# Altium PCB Four_Axis_Remoter_V1.0.0.PcbDoc (part 2 of 2)
Units mil, origin at the board's own origin, x right, y up, seen from the top; angles counter-clockwise.
Board outline 7165.07 x 4173.11 mil, 2 copper layers (Top Layer, Bottom Layer); 91 components, 71 nets, 332 pads, 134 vias.
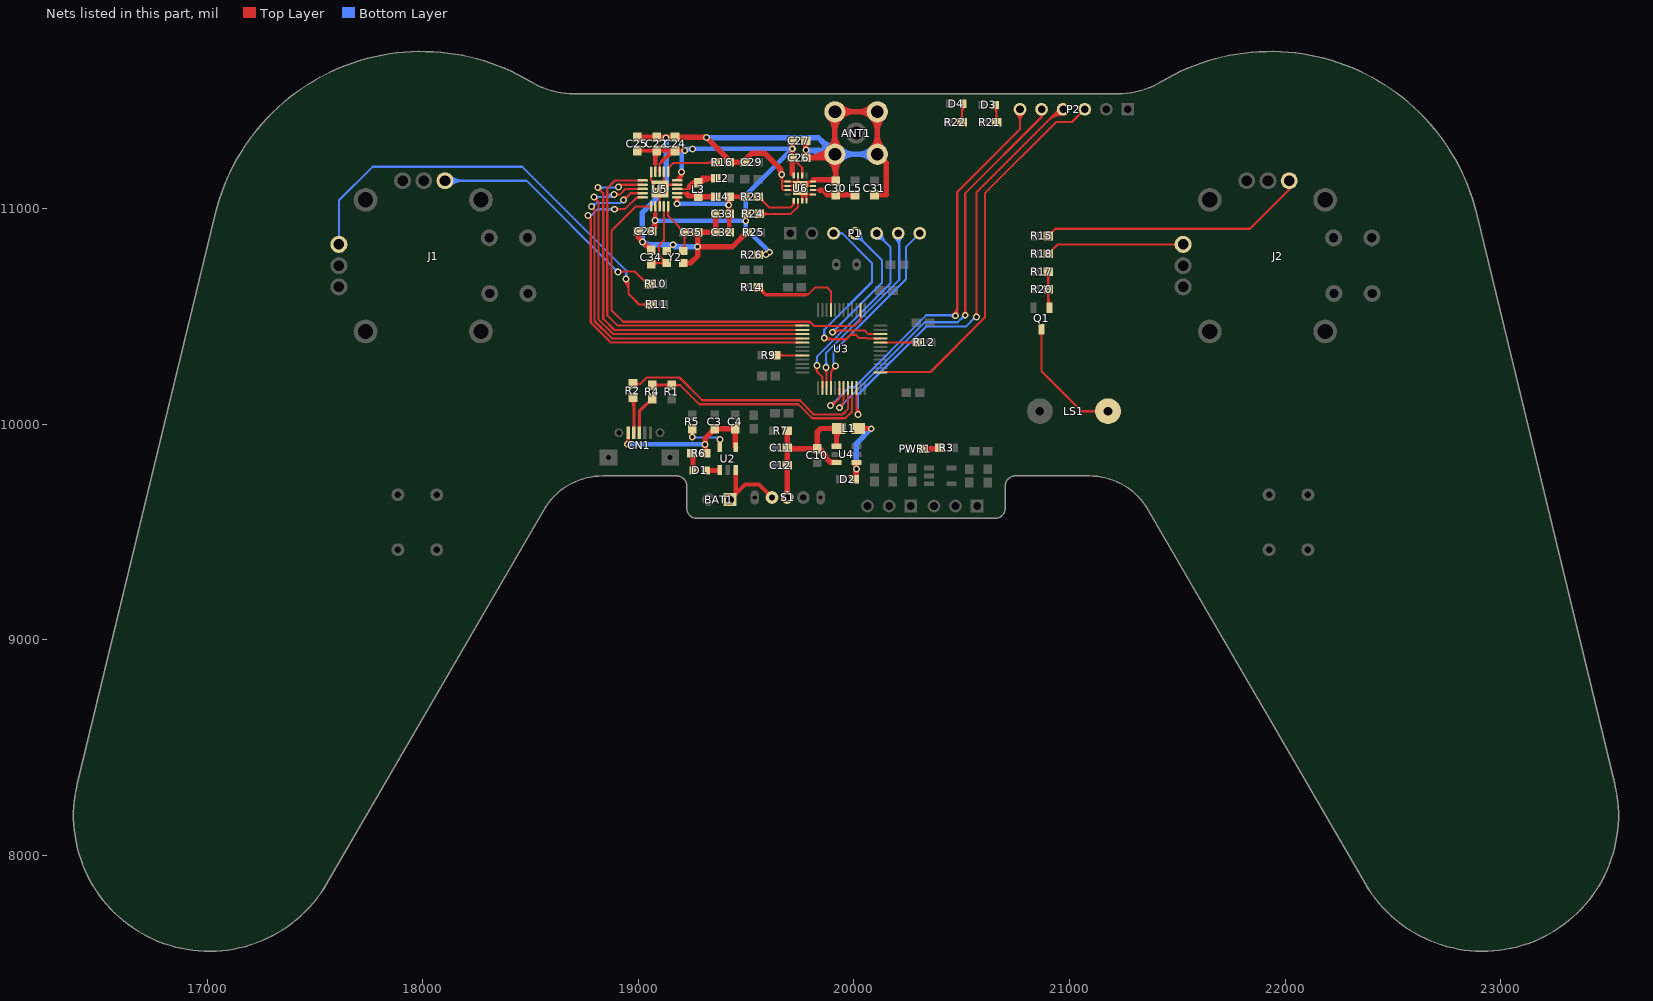
[diagram p2: the nets of this part, all layers, seen from the top]

## Via types
v1: diameter 32, hole 18, Top Layer to Bottom Layer, tented both sides, 88 vias
v2: diameter 100, hole 50, Top Layer to Bottom Layer, tented both sides, 46 vias

## Nets (pads, with @x,y where several pads share a name; then routed paths per layer and width w, separated by ;. In a path a pad name is that pad's centre, name@x,y a point inside that pad or via, vN(x,y) a via of type N, cw(c..) or ccw(c..) an arc to the next point about the centre after c; other vN are vias at no path point) (continued)
NetC30_1: C30.1 L5.1 U6.10 | length 204.7
  Top Layer w10: U6.10@19809.06,11085.16 19843,11085.16
  Top Layer w25: 19843,11085.16 19855.2,11085.16 19876.36,11064 C30.1@19915,11064 L5.1@20005,11064
NetC32_1: C32.1 C33.1 L4.2 R23.1 U5.11 | length 808.9
  Top Layer w20: v1@19174.76,11026.34 ccw(c19159.69,11041.41) 19181,11041.41 ; v1@19181,11021.88 U5.11@19181,11046.53 ; C32.1@19413.93,10897.07 ccw(c19396.86,10914.14) 19421,10914.14 ccw(c19445.14,10914.14) C32.1@19428.07,10897.07 ; C33.1@19413.93,10967.93 cw(c19396.86,10950.86) 19421,10950.86 cw(c19445.14,10950.86) C33.1@19428.07,10967.93 ; C33.1@19413.93,10982.07 ccw(c19396.86,10999.14) 19421,10999.14 ccw(c19445.14,10999.14) C33.1@19428.07,10982.07 ; L4.2@19413.93,11047.93 cw(c19396.86,11030.86) 19421,11030.86 cw(c19445.14,11030.86) L4.2@19428.07,11047.93 ; v1@19414.76,11012.75 cw(c19399.69,10997.68) 19421,10997.68 ; v1@19414.76,11021.23 ccw(c19399.69,11036.3) L4.2@19421,11036.3 ; C32.1@19421,10890 C33.1@19421,10975 19421,11014.09 L4.2@19421,11055 R23.1@19494,11055 ; L4.2@19430.57,11047.93 cw(c19447.64,11030.86) 19447.64,11055 cw(c19447.64,11079.14) L4.2@19430.57,11062.07 ; R23.1@19484.43,11047.93 ccw(c19467.36,11030.86) 19467.36,11055 ccw(c19467.36,11079.14) R23.1@19484.43,11062.07
  Bottom Layer w20: v1(19179,11022.1) 19412.99,11022.1 19419,11016.09 v1(19419,11016.99) ; 19392.18,11022.1 cw(c19392.18,10990.16) v1@19414.76,11012.75
NetC34_2: C34.2 U5.9 Y2.1 | length 512.7
  Top Layer w10: C34.2@19060,10744 19063.24,10747.24 19131.32,10747.24 19096,10782.57 19096,10829.76 19118.43,10852.18 U5.9@19118.43,11010 ; C34.2@19070.61,10735.89 cw(c19098.01,10708.49) 19098.01,10747.24 ; C34.2@19070.61,10757.11 ccw(c19094.42,10780.92) 19094.42,10747.24 ; 19106.42,10772.15 cw(c19081.51,10747.24) Y2.1@19116.73,10747.24 ; 19110.94,10767.63 ccw(c19129.45,10786.14) Y2.1@19129.45,10759.96 ; Y2.1@19120.46,10738.25 ccw(c19098.75,10716.54) 19098.75,10747.24 ccw(c19098.75,10777.94) Y2.1@19120.46,10756.24
NetC35_2: C35.2 U5.10 Y2.3 | length 403.2
  Top Layer w10: U5.10@19138.11,11010 19138.11,10965.89 C35.2@19214,10890 19214,10808.76 Y2.3@19207.99,10802.76 ; 19184.13,10919.87 cw(c19154.25,10890) C35.2@19196.5,10890 ; 19190.16,10913.84 ccw(c19211.5,10935.18) C35.2@19211.5,10905 ; Y2.3@19201.56,10811.75 ccw(c19171.52,10841.78) 19214,10841.78 ; C35.2@19203.39,10879.39 cw(c19177.79,10853.79) 19214,10853.79 cw(c19250.21,10853.79) C35.2@19224.61,10879.39 ; 19214,10825.13 ccw(c19232.93,10825.13) Y2.3@19219.54,10811.75
NetCN1_2: CN1.2 R2.1 | length 213.2
  Top Layer w15: R2.1@18966.16,10112.66 cw(c18934.18,10080.68) 18979.41,10080.68 ; R2.1@18975,10124 18979.41,10119.59 CN1.2@18979.41,9960 ; R2.1@18979.41,10101.97 cw(c18994.53,10101.97) R2.1@18983.84,10112.66
NetCN1_3: CN1.3 R4.1 | length 183.9
  Top Layer w15: CN1.3@19005,9960 19005,10059 R4.1@19065,10119
NetD1_1: D1.1 R6.1 | length 95.1
  Top Layer w25: R6.1@19246.2,9859.7 cw(c19228.56,9842.06) 19253.5,9842.06 ; D1.1@19253.5,9785 R6.1@19253.5,9860.5
NetD1_2: D1.2 U2.1 | length 59
  Top Layer w25: D1.2@19316.5,9785 U2.1@19375.5,9785
NetD2_1: D2.1 L1.1 U4.1 | length 441.9
  Top Layer w25: D2.1@19998.2,9750.3 ccw(c19966.66,9781.84) v1@20011.26,9781.84 ; D2.1@20001,9745 20011.26,9755.26 v1(20011.26,9791.75) U4.1@20011.26,9822.6 ; L1.1@20020,9980 20079.74,9980 v1@20080,9979.74 ; L1.1@20035.16,9970.74 cw(c20057.51,9948.4) 20057.51,9980 cw(c20057.51,10011.6) L1.1@20035.16,9989.26
  Bottom Layer w25: v1(20011.26,9791.75) 20011.26,9909.81 v1(20080,9978.55)
NetD3_1: D3.1 R21.1 | length 171.2
  Top Layer w10: D3.1@20648.9,11468.46 cw(c20619.68,11439.24) 20661,11439.24 ; R21.1@20650.39,11410.61 ccw(c20624.79,11436.21) 20661,11436.21 ccw(c20697.21,11436.21) R21.1@20671.61,11410.61 ; D3.1@20656.5,11480 20661,11475.5 R21.1@20661,11400
NetD4_1: D4.1 R22.1 | length 195.4
  Top Layer w10: R22.1@20490.39,11410.61 ccw(c20464.79,11436.21) 20501,11436.21 ccw(c20537.21,11436.21) R22.1@20511.61,11410.61 ; R22.1@20501,11400 20501,11479.5 D4.1@20506.5,11485 ; 20501,11441.85 cw(c20545.71,11441.85) D4.1@20514.1,11473.46 ; D4.1@20501,11465.99 cw(c20521.57,11465.99) D4.1@20507.03,11480.53
NetJ1_3: J1.3 R11.2 | length 2217.6
  Top Layer w10: v1@18935.22,10664.5 cw(c18888.08,10617.36) 18954.75,10617.36 ; v1@18942.29,10671.58 cw(c18912.22,10641.51) 18954.75,10641.51 ; v1(18943,10672.28) 18954.75,10660.53 18954.75,10603.41 19003.16,10555 R11.2@19054,10555 ; R11.2@19040.89,10544.39 ccw(c19015.29,10518.79) 19015.29,10555 ccw(c19015.29,10591.21) R11.2@19040.89,10565.61
  Bottom Layer w10: J1.3@17611.3,10833.43 17611.3,11037.02 17767.89,11193.61 18462.09,11193.61 18944,10711.69 v1@18944,10672.28 ; v1@18935.22,10680.06 ccw(c18914.03,10701.25) 18944,10701.25 ; 18944,10696.43 ccw(c18967.14,10696.43) v1@18950.78,10680.06
NetJ1_6: J1.6 R10.1 | length 1508.7
  Top Layer w10: v1@18908,10707.44 18984.56,10707.44 19042,10650 R10.1@19049,10650 ; v1@18912.78,10698.29 cw(c18934.86,10676.21) 18934.86,10707.44 ; v1@18912.78,10713.85 ccw(c18928.25,10729.33) 18928.25,10707.44 ; 19013.21,10678.79 ccw(c19046.5,10712.08) R10.1@19046.5,10665 ; 19024.08,10667.92 cw(c19006.15,10650) R10.1@19031.5,10650
  Bottom Layer w10: J1.6@18103.43,11128.7 18481.74,11128.7 18899.99,10710.45 v1@18911,10710.45 ; J1.6@18120.66,11111.47 cw(c18162.26,11069.87) 18162.26,11128.7 cw(c18162.26,11187.54) J1.6@18120.66,11145.93 ; J1.6@18127.73,11104.4 cw(c18186.4,11045.72) 18186.4,11128.7 cw(c18186.4,11211.68) J1.6@18127.73,11153 ; 18885.14,10725.3 ccw(c18905,10745.15) v1@18905,10717.07 ; 18886.67,10723.77 cw(c18868.97,10706.07) v1@18894,10706.07
  other v1: 18905,10706.07
NetJ2_3: J2.3 R18.2 | length 643.3
  Top Layer w10: R18.2@20901,10790 20944.43,10833.43 J2.3@21526.3,10833.43
NetJ2_6: J2.6 R15.1 | length 1247.2
  Top Layer w10: R15.1@20901,10872.5 20934.63,10906.13 21836.29,10906.13 22018.43,11088.26 J2.6@22018.43,11128.7
NetL2_1: L2.1 L3.2 U5.13 | length 296.6
  Top Layer w10: U5.13@19180,11090.63 19235.34,11090.63 19240.74,11096.03 ; L3.2@19264.71,11120 L3.2@19278,11120
  Top Layer w25: 19236,11100.77 19255.23,11120 L3.2@19264.71,11120 ; 19243.85,11108.62 cw(c19262.42,11090.05) L3.2@19274.54,11113.35 ; L3.2@19278,11120 19298,11140 L2.1@19359,11140 ; L3.2@19283.3,11117.2 cw(c19338.36,11062.14) L2.1@19338.36,11140
NetL3_1: L3.1 L4.1 U5.12 | length 187.5
  Top Layer w10: U5.12@19180,11070.94 19226,11070.94 ; L4.1@19356,11058 L4.1@19359,11055
  Top Layer w25: 19226,11065.26 19233.26,11058 L3.1@19278,11058 19281,11055 L4.1@19359,11055
NetLS1_2: LS1.2 Q1.3 | length 613.8
  Top Layer w10: Q1.3@20863.79,10423.75 cw(c20848.8,10408.76) 20870,10408.76 cw(c20891.2,10408.76) Q1.3@20876.21,10423.75 ; Q1.3@20870,10440.79 20870,10244.77 21054.77,10060 LS1.2@21178,10060
NetPWR1_1: PWR1.1 R3.1 | length 105.1
  Top Layer w25: PWR1.1@20316.5,9885 R3.1@20394,9885 ; 20366.32,9885 ccw(c20366.32,9920.18) R3.1@20391.2,9895.3
NetQ1_1: Q1.1 R17.2 R20.1 | length 390.3
  Top Layer w10: R20.1@20890.39,10614.39 cw(c20864.79,10588.79) 20901,10588.79 cw(c20937.21,10588.79) R20.1@20911.61,10614.39 ; R20.1@20890.39,10635.61 ccw(c20864.79,10661.21) 20901,10661.21 ccw(c20937.21,10661.21) R20.1@20911.61,10635.61 ; R17.2@20890.39,10696.89 cw(c20864.79,10671.29) 20901,10671.29 cw(c20937.21,10671.29) R17.2@20911.61,10696.89 ; Q1.1@20901,10562.55 ccw(c20919.91,10562.55) Q1.1@20906.54,10549.18 ; 20901,10586.69 ccw(c20944.05,10586.69) Q1.1@20913.61,10556.25 ; R17.2@20901,10707.5 R20.1@20901,10625 20901,10545.61 Q1.1@20907.4,10539.21
NetR5_2: R5.2 U2.5 | length 377.9
  Top Layer w10: R5.2@19239.39,9965.89 cw(c19213.79,9940.29) 19250,9940.29 cw(c19286.21,9940.29) R5.2@19260.61,9965.89 ; v1@19242.22,9948.46 ccw(c19223.44,9967.23) 19250,9967.23 ccw(c19276.56,9967.23) v1@19257.78,9948.46 ; v1@19250,9934.76 19250,9938.77 R5.2@19250,9979 ; v1@19371.22,9921.52 cw(c19357.27,9907.57) U2.5@19377,9907.57 ; U2.5@19373.76,9908.24 ccw(c19365.93,9916.07) v1@19377,9916.07 ; U2.5@19377,9897.92 cw(c19410.38,9897.92) v1@19386.78,9921.52 ; v1@19377,9920.9 ccw(c19394.9,9920.9) U2.5@19382.24,9908.24 ; v1@19377,9929.75 19377,9893.5 U2.5@19378,9892.5
  Bottom Layer w10: v1@19250,9938.77 19369.53,9938.77 v1(19379,9929.3)
  other v1: 19250,9940.68
NetR9_2: R9.2 U3.20 | length 180.8
  Top Layer w10: R9.2@19637.05,10318.95 U3.20@19760.92,10318.95 ; R9.2@19649.11,10309.39 cw(c19672.17,10286.33) 19672.17,10318.95 ; R9.2@19649.11,10330.61 ccw(c19677.26,10358.76) 19677.26,10318.95
NetR12_1: R12.1 U3.44 | length 228.6
  Top Layer w10: U3.44@20123.13,10378 20292,10378 R12.1@20294,10380 ; 20250.46,10378 ccw(c20250.46,10421.04) R12.1@20280.89,10390.61 ; 20260.11,10378 cw(c20260.11,10348.61) R12.1@20280.89,10369.39
NetR14_2: R14.2 U3.9 | length 506.5
  Top Layer w10: 19778,10602.13 19788,10602.13 19820.05,10634.17 19875,10634.17 19892.81,10616.36 U3.9@19892.81,10529.58
  Top Layer w15: R14.2@19556,10635.35 19591.72,10599.63 19778,10599.63 ; R14.2@19558.5,10622.85 cw(c19558.5,10598.71) R14.2@19575.57,10615.78 ; R14.2@19571,10635.35 ccw(c19607.21,10635.35) 19581.61,10609.74
NetR16_2: R16.2 U5.16 | length 326.9
  Top Layer w10: U5.16@19138.11,11170 19138.11,11187.87 19161.31,11211.07 19355.06,11211.07 R16.2@19359,11215 ; 19310.79,11211.07 ccw(c19310.79,11260.71) R16.2@19345.89,11225.61 ; 19329.79,11211.07 cw(c19329.79,11188.29) R16.2@19345.89,11204.39 ; 19334.93,11211.07 ccw(c19334.93,11236.57) R16.2@19352.96,11218.54
NetR23_2: R23.2 U6.5 | length 283.4
  Top Layer w10: R23.2@19556,11055 19566.13,11044.87 19606.59,11004.41 19707.06,11004.41 19720.47,11017.82 U6.5@19720.47,11035.94 ; R23.2@19558.5,11040 cw(c19558.5,11009.82) 19579.84,11031.16 ; R23.2@19573.5,11055 ccw(c19615.75,11055) 19585.87,11025.13 ; 19714.05,11011.4 ccw(c19698.37,11027.09) U6.5@19720.55,11027.09
NetR24_2: R24.2 U6.6 | length 277.4
  Top Layer w10: R24.2@19561,10975 19706.72,10975 19740.16,11008.44 U6.6@19740.16,11035.94 ; R24.2@19574.11,10964.39 cw(c19599.71,10938.79) 19599.71,10975 cw(c19599.71,11011.21) R24.2@19574.11,10985.61
NRF_CE: U3.13 U5.1 | length 1692.9
  Top Layer w10: U5.1@19020,11130 18891.74,11130 18856,11094.26 18856,10505.15 18904.41,10456.74 U3.13@19760.92,10456.74
NRF_CS: U3.14 U5.2 | length 1845.3
  Top Layer w10: v1@18812,11085.77 cw(c18812,11061.83) 18828.92,11078.76 ; v1(18812,11096.77) v1@18817,11091.77 ; v1@18817,11090.68 18837,11070.68 18837,10489.08 18887.21,10438.87 18889.02,10437.06 U3.14@19760.92,10437.06 ; v1@18823,11096.77 ccw(c18852.18,11096.77) 18831.55,11076.14 ; v1@18913.35,11110.32 U5.2@19020,11110.32
  Bottom Layer w10: v1(18812,11096.77) v1@18904.81,11096.77 ; v1@18819.78,11088.99 cw(c18838.56,11070.21) 18838.56,11096.77 cw(c18838.56,11123.32) v1@18819.78,11104.55
  other v1: 18908,11099.96
NRF_IRQ: U3.2 U5.6 | length 1842.5
  Top Layer w10: U5.6@19059.37,11010 18989.05,11010 18875,10895.95 18875,10529.35 18929.74,10474.61 19795.82,10474.61 19806.3,10464.14 19806.3,10463.95 19814.37,10455.88 20004.01,10455.88 20030.61,10482.48 U3.2@20030.61,10529.58
NRF_MISO: U3.17 U5.5 | length 1911
  Top Layer w10: 18779.13,10955.05 18779.13,10471.12 18865,10385.24 18872.25,10378 U3.17@19760.92,10378 ; v1@18887,10998.1 18938.87,10998.1 18992.03,11051.26 U5.5@19020,11051.26 ; v1@18896.78,10988.83 cw(c18919.16,10966.45) 18919.16,10998.1 ; v1@18896.78,11004.39 ccw(c18911.95,11019.56) 18911.95,10998.1 ; 18983.93,11043.16 cw(c19001.3,11025.79) U5.5@19001.3,11050.35 ; 18987.39,11046.62 cw(c18997.54,11036.48) U5.5@19001.08,11050.38
  Bottom Layer w10: v1(18767,10967.33) 18780.89,10967.33 18810.17,10996.61 v1(18889,10996.61) ; v1@18881.22,10988.83 ccw(c18862.44,10970.05) 18862.44,10996.61 ccw(c18862.44,11023.17) v1@18881.22,11004.39
NRF_MOSI: U3.16 U5.4 | length 1896.2
  Top Layer w10: v1@18777,11011.82 18797,10991.82 18797,10478.53 18877.84,10397.69 U3.16@19760.92,10397.69 ; v1@18782.42,10998.28 cw(c18783.1,10980.37) 18795.77,10993.05 cw(c18804.98,11002.26) v1@18792.52,11006.06 ; v1@18930,11047.45 18941.46,11047.45 18964.95,11070.94 U5.4@19020,11070.94 ; v1@18931,11051.27 ccw(c18931,11085.75) 18955.38,11061.37 ; v1@18942,11040.27 cw(c18960.64,11040.27) 18947.46,11053.45
  Bottom Layer w10: v1(18782,11009.28) 18790.86,11009.28 18807.84,11026.25 ; v1@18784.73,11019.93 ccw(c18790.74,11043.35) 18807.84,11026.25 ; v1(18931,11040.27) 18916.98,11026.25 18807.84,11026.25
NRF_SCK: U3.15 U5.3@19020,11090.63 | length 1998.8
  Top Layer w10: v1@18794,11042.25 cw(c18794,11018.31) 18810.93,11035.23 ; v1@18794.13,11052.04 18816,11030.16 18816,10484.8 18879.81,10420.99 18883.43,10417.37 U3.15@19760.92,10417.37 ; v1@18805,11053.25 ccw(c18834.17,11053.25) 18813.54,11032.62 ; v1(18887,11064.48) 18913.73,11064.48 18939.88,11090.63 U5.3@19020,11090.63 ; v1@18894.78,11056.7 cw(c18913.56,11037.92) 18913.56,11064.48 cw(c18913.56,11091.04) v1@18894.78,11072.26
  Bottom Layer w10: v1(18794,11053.25) 18875.77,11053.25 v1(18887,11064.48) ; v1@18801.78,11045.47 cw(c18820.56,11026.69) 18820.56,11053.25 cw(c18820.56,11079.8) v1@18801.78,11061.03 ; 18833.33,11053.25 ccw(c18833.33,11118.15) v1@18879.22,11072.26 ; 18857.47,11053.25 ccw(c18857.47,11094.01) v1@18886.29,11065.19
OLED_CS: P1.7 U3.28 | length 917.5
  Top Layer w10: U3.28@19892.81,10167.37 19892.81,10243.09 v1@19916,10266.28 ; 19895.21,10245.49 ccw(c19875.85,10264.86) v1@19903.07,10267.87 ; 19903.41,10253.7 cw(c19914,10243.11) v1@19914,10258.08
  Bottom Layer w10: v1@19905.13,10277.95 19905.13,10335.96 20242,10672.84 20242,10822 P1.7@20305,10885
  other v1: 19914,10269.08
OLED_DC: P1.6 U3.27 | length 1078.5
  Top Layer w10: v1@19863.22,10255.54 cw(c19839.31,10231.63) 19873.13,10231.63 ; U3.27@19873.13,10167.37 19873.13,10258.79 v1@19877,10262.67 ; 19873.13,10241.9 cw(c19892.42,10241.9) v1@19878.78,10255.54
  Bottom Layer w10: v1@19863.22,10271.1 ccw(c19844.44,10289.88) 19871,10289.88 ccw(c19897.56,10289.88) v1@19878.78,10271.1 ; v1(19871,10263.32) 19871,10330.66 20210,10669.66 20210,10880 P1.6@20205,10885 ; P1.6@20187.66,10867.66 cw(c20133.71,10813.71) 20210,10813.71 ; P1.6@20194.73,10874.73 cw(c20157.86,10837.86) 20210,10837.86 cw(c20252.14,10837.86) P1.6@20222.34,10867.66
OLED_DI: P1.4 U3.46 | length 1093
  Top Layer w10: v1@19899,10425.03 v1(19900.23,10426.26) 19908.7,10434.73 19934,10434.73 ; v1@19901.1,10425.76 cw(c19916.66,10416.76) 19916.66,10434.73 ; v1@19909.75,10420.75 cw(c19934,10406.72) 19934,10434.73 ; 19920,10434.73 19934,10434.73 ; U3.46@20123.13,10417.37 20065.87,10417.37 20048.5,10434.73 19934,10434.73
  Bottom Layer w10: v1(19900.23,10426.26) 20130,10656.03 20130,10760 P1.4@20005,10885 ; v1@19900.23,10437.26 ccw(c19900.23,10463.82) 19919.01,10445.04 ccw(c19937.79,10426.26) v1@19911.23,10426.26 ; P1.4@20005,10860.47 cw(c20005,10801.26) 20046.87,10843.13 cw(c20088.74,10885) P1.4@20029.53,10885 ; P1.4@20005,10870.47 cw(c20005,10835.4) 20029.8,10860.2 cw(c20054.6,10885) P1.4@20019.53,10885
OLED_DO: P1.3 U3.45 | length 1068.1
  Top Layer w10: v1@19868,10393.68 19962.84,10393.68 19984.04,10414.88 20007.96,10414.88 20024.08,10398.76 20059.2,10398.76 20060.27,10397.69 U3.45@20123.13,10397.69 ; v1@19869.78,10406.68 ccw(c19901.17,10438.07) 19901.17,10393.68
  Bottom Layer w10: v1@19854.22,10406.68 ccw(c19835.44,10425.46) 19862,10425.46 ccw(c19888.56,10425.46) v1@19869.78,10406.68 ; v1(19862,10398.9) 19862,10437.59 20083.92,10659.5 20083.92,10746.12 19945.04,10885 ; P1.3@19905,10885 19945.04,10885 ; P1.3@19926.85,10873.86 cw(c19945.03,10864.59) 19945.03,10885 ; P1.3@19926.85,10896.14 ccw(c19945.03,10905.41) 19945.03,10885
OLED_RES: P1.5 U3.26 | length 1127.5
  Top Layer w10: v1@19820.22,10263.37 cw(c19801.44,10244.59) 19828,10244.59 cw(c19854.56,10244.59) v1@19835.78,10263.37 ; v1(19828,10271.15) 19828,10244.44 19853.44,10219 U3.26@19853.44,10167.37
  Bottom Layer w10: v1@19820.22,10278.93 ccw(c19801.44,10297.71) 19828,10297.71 ccw(c19854.56,10297.71) v1@19835.78,10278.93 ; v1(19828,10271.15) 19828,10312.94 20169,10653.94 20169,10821 P1.5@20105,10885 ; P1.5@20105,10860.47 cw(c20105,10801.26) 20146.87,10843.13 cw(c20188.74,10885) P1.5@20129.53,10885 ; P1.5@20105,10870.47 cw(c20105,10835.4) 20129.8,10860.2 cw(c20154.6,10885) P1.5@20119.53,10885
RF_3V3: C22.1 C23.1 C24.1 C25.1 C26.2 C27.2 R24.1 R26.1 U5.7 U5.15 U5.18 U5.19 U6.14 U6.16 | length 3260.9
  Top Layer w10: 19079.06,10973.2 U5.7@19079.06,11010 ; U5.19@19079.06,11170 19079.06,11208.94 ; U5.18@19098.74,11170 19098.74,11207.21 19109.38,11217.86 ; 19714,11160.53 U6.16@19720.47,11154.06 ; C26.2@19714,11234.68 19759.84,11188.84 U6.14@19759.84,11154.06 ; C26.2@19716.5,11220 cw(c19716.5,11190.59) 19737.3,11211.38 ; C26.2@19731.5,11235 ccw(c19774.51,11235) 19744.1,11204.59
  Top Layer w20: C25.1@18995,11269 C22.1@19085,11269 ; C25.1@19002.07,11261.93 cw(c19019.14,11244.86) 19019.14,11269 cw(c19019.14,11293.14) C25.1@19002.07,11276.07 ; C23.1@19057.43,10902.07 ccw(c19005.22,10954.28) v1@19079.06,10954.28 ; C23.1@19062,10895 19079.06,10912.06 19079.06,10973.2 ; v1@19073.76,10940.31 cw(c19060.97,10927.52) 19079.06,10927.52 ; v1@19073.76,10948.79 ccw(c19060.97,10961.58) 19079.06,10961.58 ; C22.1@19077.93,11261.93 ccw(c19060.86,11244.86) 19060.86,11269 ccw(c19060.86,11293.14) C22.1@19077.93,11276.07 ; 19079.06,11208.94 19079.06,11263.06 C22.1@19085,11269 ; 19079.06,11228.01 cw(c19123.49,11228.01) C22.1@19092.07,11259.43 ; C22.1@19092.07,11261.93 cw(c19109.14,11244.86) 19109.14,11269 cw(c19109.14,11293.14) C22.1@19092.07,11276.07 ; 19109.38,11217.86 C24.1@19160.53,11269 ; 19132.49,11240.96 cw(c19170,11203.45) C24.1@19170,11256.5 ; C24.1@19162.93,11261.93 ccw(c19145.86,11244.86) 19145.86,11269 ccw(c19145.86,11293.14) C24.1@19162.93,11276.07 ; C24.1@19177.07,11261.93 cw(c19194.14,11244.86) 19194.14,11269 cw(c19194.14,11293.14) C24.1@19177.07,11276.07 ; U5.15@19185.22,11135.22 19199,11149 v1@19199,11168.38 ; 19194.46,11144.46 ccw(c19182.73,11156.19) v1@19196.15,11165.95 ; 19198.61,11269 ccw(c19198.61,11286.18) v1@19210.76,11274.03 ; 19199,11150.16 cw(c19220.31,11150.16) v1@19205.24,11165.23 ; v1@19211.08,11269 C24.1@19170,11269 C24.1@19160.53,11269 ; R24.1@19491.93,10967.93 cw(c19474.86,10950.86) 19499,10950.86 cw(c19523.14,10950.86) R24.1@19506.07,10967.93 ; v1@19493.76,10946.77 ccw(c19481.1,10959.42) R24.1@19499,10959.42 ; v1@19499,10946.84 R24.1@19499,10975 ; R26.1@19556,10785.35 v1@19599.2,10785.35 ; R26.1@19565.57,10778.28 cw(c19582.64,10761.21) 19582.64,10785.35 cw(c19582.64,10809.49) R26.1@19565.57,10792.42 ; R26.1@19566.61,10785.35 ccw(c19566.61,10839.3) v1@19604.76,10801.15 ; R26.1@19574.94,10785.35 ccw(c19574.94,10803.47) v1@19587.76,10790.66 ; C22.1@19085,11269 C24.1@19160.53,11269
  Top Layer w25: 19714,11160.53 19714,11234.68 C26.2@19714,11235 v1(19714,11277.05) C27.2@19714,11315
  Bottom Layer w20: v1@19082.24,10948.79 ccw(c19097.37,10963.92) 19097.37,10942.52 ; v1@19083.67,10942.52 v1(19498,10942.52) ; v1(19201,11169.48) 19201,11255.79 v1(19215,11269.79) 19222.26,11277.05 v1(19714,11277.05) 19498,11061.05 v1(19498,10942.52) ; v1@19219.24,11265.55 cw(c19247.01,11237.78) v1@19247.01,11277.05 ; 19234.2,11277.05 cw(c19234.2,11259.28) v1@19246.76,11271.84 ; v1@19255.24,11271.84 cw(c19267.8,11259.28) 19267.8,11277.05 ; v1(19609,10796.91) 19498,10907.91 v1(19498,10942.52)
  other v1: 19592,10786.42 19078,10944.55 19251,11276.08
RF_GND: ANT1.2 C22.2 C23.2 C24.2 C25.2 C26.1 C27.1 C29.2 C30.2 C31.2 C32.2 C33.2 C34.1 C35.1 R16.1 R25.1 U5.0 U5.8 U5.14 U5.17 U5.20 U6.1 U6.2 U6.3 U6.7 U6.8 U6.9 U6.11 U6.12 U6.15 U6.17 Y2.2 Y2.4 | length 8800.8
  Top Layer w10: U5.20@19059.37,11169.37 19059.37,11130.63 ; U5.0@19064.29,11125.71 cw(c19043.26,11104.68) U5.0@19073,11104.68 ; U5.0@19067.09,11099.92 ccw(c19037.56,11108.82) 19059.37,11130.63 ; U5.0@19067.47,11122.53 ccw(c19084,11139.05) U5.0@19084,11115.68 ; U5.0@19076.67,11097.03 ccw(c19055.73,11103.34) 19071.19,11118.81 ccw(c19086.66,11134.27) U5.0@19092.97,11113.33 ; U5.0@19083.47,11106.53 ccw(c19117,11140.06) U5.0@19117,11092.64 ; U5.0@19090.08,11122.91 cw(c19081.18,11152.44) 19059.37,11130.63 ; U5.8@19098.74,11010 U5.0@19098.74,11079.01 ; U5.0@19100,11090 19059.37,11130.63 ; U5.0@19100.54,11089.46 ccw(c19117,11105.92) U5.0@19117,11082.64 ; U5.0@19118.43,11108.43 U5.17@19118.43,11170 ; U5.0@19120.31,11110.32 U5.14@19180,11110.32 ; v1@19657.39,11149.83 cw(c19638.48,11130.1) 19665.81,11130.1 ; 19665.81,11133.16 cw(c19689.61,11133.16) v1@19672.78,11149.99 ; v1@19665.81,11156.44 19665.81,11130.11 ; U6.3@19697.46,11085.16 ccw(c19697.46,11148.46) U6.17@19742.22,11103.7 ; U6.1@19701.13,11124.53 cw(c19701.13,11094.11) U6.17@19731.54,11094.67 ; 19705.04,11085.16 cw(c19705.04,11050.04) U6.17@19729.87,11074.87 ; 19705.04,11104.84 ccw(c19705.04,11139.96) U6.17@19729.87,11115.13 ; 19706.36,11085.16 ccw(c19706.36,11114.48) U6.17@19733.14,11102.53 ; 19706.36,11104.84 cw(c19706.36,11075.52) U6.17@19733.14,11087.47 ; 19711.31,11124.53 cw(c19711.31,11094.3) U6.17@19741.54,11094.85 ; U6.17@19721.5,11124.53 cw(c19721.5,11094.48) U6.17@19751.54,11095.03 ; U6.17@19721.6,11085.16 ccw(c19721.6,11124.32) U6.17@19749.29,11096.63 ; U6.17@19729.65,11115.35 ccw(c19750,11135.7) U6.17@19750,11106.92 ; U6.17@19730,11101.68 19726.84,11104.84 U6.2@19690.94,11104.84 19668.98,11104.84 19665.81,11108.01 ; U6.17@19731.87,11113.13 cw(c19714.67,11095.92) U6.17@19739,11095.92 ; U6.17@19740.16,11122.1 ccw(c19776.18,11122.1) U6.17@19750.71,11096.63 ; U6.15@19740.16,11146.24 ccw(c19800.32,11146.24) U6.17@19757.78,11103.7 ; U6.15@19740.16,11154.06 U6.17@19740.16,11104.84 ; U6.17@19742.22,11088.14 cw(c19699.68,11045.6) U6.7@19759.84,11045.6 ; U6.17@19747.62,11076.69 cw(c19742.89,11040.36) U6.8@19779.53,11040.36 ; U6.17@19748.46,11095.03 cw(c19778.5,11094.48) U6.17@19778.5,11124.53 ; U6.17@19748.91,11086.61 cw(c19744.37,11051.75) 19779.53,11051.75 ; U6.17@19749.29,11095.21 cw(c19723.82,11069.74) U6.17@19759.84,11069.74 ; U6.17@19750,11084.92 cw(c19750,11060.59) U6.17@19767.21,11077.79 ; U6.17@19750.2,11096.52 cw(c19745.85,11063.13) U6.17@19779.53,11063.13 ; U6.17@19750.71,11095.21 cw(c19773.95,11071.97) U6.17@19773.95,11104.84 ; U6.17@19753.31,11091.69 U6.17@19759.84,11085.16 ; U6.17@19757.78,11088.14 cw(c19798.09,11047.83) U6.11@19798.09,11104.84 ; U6.17@19758.46,11094.85 cw(c19788.69,11094.3) 19788.69,11124.53 ; U6.7@19759.84,11035.94 U6.17@19759.84,11085.16 ; U6.17@19761,11085.59 19760.57,11085.16 U6.17@19759.84,11085.16 ; U6.17@19761,11095.92 ccw(c19789.78,11095.92) U6.17@19769.43,11075.57 ; U6.17@19768.46,11094.67 cw(c19798.87,11094.11) U6.12@19798.87,11124.53 ; U6.17@19778.46,11094.48 cw(c19809.05,11093.93) U6.12@19809.06,11124.53 U6.17@19779.53,11124.53 ; U6.8@19779.53,11035.94 U6.17@19779.53,11065.47 ; U6.9@19809.06,11065.47 U6.17@19779.53,11065.47 ; U6.11@19809.06,11104.84 19759.84,11104.84 U6.17@19750,11095 U6.17@19740.16,11104.84 ; 19665.81,11108.01 19665.81,11091.21 19671.86,11085.16 U6.3@19690.94,11085.16 U6.17@19759.84,11085.16 ; 19665.81,11108.01 19665.81,11130.11 ; 19665.81,11130.11 19671.39,11124.53 U6.1@19690.94,11124.53 19720.47,11124.53 U6.17@19740.16,11104.84 ; U6.17@19759.84,11085.16 U6.17@19779.53,11065.47
  Top Layer w25: C25.2@18995,11331 C22.2@19085,11331 C24.2@19170,11331 v1@19314.31,11331 ; 19000,10870.86 cw(c19026.64,10870.86) C23.2@19007.8,10889.7 ; C23.2@19000,10895 19000,10866 C34.1@19060,10806 ; C34.1@19042.93,10823.07 ccw(c19060,10840.14) C34.1@19060,10816 ; Y2.2@19207.99,10747.24 19242.45,10747.24 19276,10780.79 v1@19276,10822.67 ; v1@19316.37,11328.94 19421,11224.31 R16.1@19421,11215 19484.69,11215 19525.06,11255.37 19586.94,11255.37 19598.87,11243.44 19598.87,11243.21 19661,11181.08 19661,11161.25 v1@19665.81,11156.44 ; C33.2@19359,10975 C32.2@19359,10890 C35.1@19276,10890 v1@19276,10822.67 ; 19397.34,11247.97 cw(c19364.37,11215) R16.1@19411,11215 ; 19429,10822.67 v1@19276,10822.67 ; 19436.67,10822.67 R25.1@19504,10890 ; R25.1@19486.93,10872.93 ccw(c19469.86,10890) R25.1@19494,10890 ; C29.2@19504,11215 cw(c19550.63,11215) 19517.66,11247.97 ; 19645.37,11196.71 cw(c19606.42,11157.77) v1@19661.5,11157.77 ; 19651.34,11190.74 cw(c19625.35,11164.75) v1@19661.55,11158.37 ; 19661,11175.87 ccw(c19683.11,11175.87) v1@19667.47,11160.24 ; C27.1@19776,11315 C26.1@19776,11235 19895,11235 ANT1.2@19911.57,11251.57 ; C26.1@19782.93,11235 ccw(c19782.93,11380.22) 19885.62,11277.53 ccw(c19822.94,11340.21) 19911.57,11340.21 ccw(c20000.21,11340.21) ANT1.2@19937.53,11277.53 ; 19814,11132.64 19908.36,11132.64 C30.2@19915,11126 19915,11248.15 ANT1.2@19911.57,11251.57 ; 19843.28,11235 ccw(c19843.28,11319.87) ANT1.2@19903.29,11259.86 ; 19862.96,11235 cw(c19862.96,11202.96) 19885.62,11225.62 cw(c19814.67,11154.67) 19915,11154.67 ; ANT1.2@19885.62,11422.47 cw(c19822.94,11359.79) 19911.57,11359.79 cw(c20000.21,11359.79) 19937.53,11422.47 cw(c20000.21,11359.79) 20000.21,11448.43 cw(c20000.21,11537.06) ANT1.2@19937.53,11474.38 ; 19886.89,11132.64 cw(c19886.89,11100.39) C30.2@19909.7,11123.2 ; 19915,11171.21 cw(c19991.94,11171.21) ANT1.2@19937.53,11225.62 ; ANT1.2@20082.47,11277.53 ccw(c20019.79,11340.21) 20108.43,11340.21 ccw(c20197.06,11340.21) ANT1.2@20134.38,11277.53 ; ANT1.2@20082.47,11474.38 cw(c20019.79,11537.06) 20019.79,11448.43 cw(c20019.79,11359.79) 20082.47,11422.47 cw(c20019.79,11359.79) 20108.43,11359.79 cw(c20197.06,11359.79) ANT1.2@20134.38,11422.47 ; C31.2@20095,11064 20150,11064 20150,11210 ANT1.2@20108.43,11251.57 ANT1.2@20108.43,11448.43 ANT1.2@19911.57,11448.43 ANT1.2@19911.57,11251.57
  Bottom Layer w25: v1(19019,10844.43) 19019,10981.01 v1@19117,11079.01 ; v1@19021.47,10846.9 ccw(c19057.23,10882.65) 19057.23,10832.09 ; 19031.33,10832.09 v1(19160,10832.09) ; v1@19114.53,11084.12 ccw(c19079.58,11119.06) 19129,11119.06 ; v1@19129,11091.01 v1(19129,11328.04) ; v1@19162.47,10834.57 ccw(c19191.2,10863.29) 19191.2,10822.67 ; v1@19169.42,10822.67 v1(19275,10822.67) ; v1@19316,11328.04 19835.11,11328.04 ANT1.2@19892.37,11270.78 ; 19837.17,11270.78 cw(c19837.17,11177.51) ANT1.2@19903.27,11243.31 ; ANT1.2@19874.86,11251.57 ccw(c19786.23,11251.57) 19848.9,11314.25 ccw(c19911.57,11376.92) ANT1.2@19911.57,11288.29 ; ANT1.2@19885.56,11225.67 ccw(c19777.01,11117.61) v1(19777,11270.78) ANT1.2@19892.37,11270.78 ; ANT1.2@19937.53,11225.62 cw(c20000.21,11162.94) 20000.21,11251.57 cw(c20000.21,11340.21) ANT1.2@19937.53,11277.53 ; ANT1.2@20082.47,11225.62 ccw(c20019.79,11162.94) 20019.79,11251.57 ccw(c20019.79,11340.21) ANT1.2@20082.47,11277.53 ; ANT1.2@20108.43,11251.57 ANT1.2@19911.57,11251.57 ANT1.2@19892.37,11270.78
  other v1: 19117,11081.64 19750,11095.92 19084,11104.68 19665,11157.77 19316,11328.57
SWD_CLK: P2.3 U3.37 | length 1789.4
  Top Layer w10: U3.37@20123.13,10240.21 20124.94,10242.02 20354.56,10242.02 20607,10494.46 20607,11070.26 20937.75,11401.01 21011.01,11401.01 P2.3@21070,11460
SWD_DIO: P2.4 U3.34 | length 2393.4
  Top Layer w10: 20010.92,10067.12 ccw(c20040.92,10067.12) v1@20019.71,10045.91 ; 20010.92,10091.26 ccw(c20065.06,10091.26) v1@20026.78,10052.98 ; U3.34@20010.92,10167.37 20010.92,10056.2 v1@20019,10048.12 ; v1@20560.22,10504.61 ccw(c20541.44,10523.38) 20568,10523.38 ccw(c20594.56,10523.38) v1@20575.78,10504.61 ; v1(20568,10496.83) 20568,11075 20953,11460 P2.4@20970,11460 ; 20899.1,11406.11 cw(c20970,11335.21) P2.4@20970,11435.47 ; 20916.17,11423.18 cw(c20970,11369.35) P2.4@20970,11445.47 ; 20933.25,11440.25 cw(c20970,11403.49) P2.4@20970,11455.47 ; 20940.15,11447.15 ccw(c20927.31,11460) P2.4@20945.47,11460
  Bottom Layer w10: v1@20011.22,10052.98 ccw(c19992.44,10071.76) 20019,10071.76 ccw(c20045.56,10071.76) v1@20026.78,10052.98 ; v1(20019,10045.2) 20019,10137.48 20333.74,10452.22 20518.15,10452.22 v1@20565,10499.08
USART_RX: P2.5 U3.31 | length 2136.9
  Top Layer w10: v1@19935,10085.83 19951.87,10102.7 ; v1@19942.93,10077.03 cw(c19973.94,10080.62) 19951.86,10102.7 ; U3.31@19951.87,10167.37 19951.87,10102.7 ; v1@20508.22,10512.9 ccw(c20489.44,10531.68) 20516,10531.68 ccw(c20542.56,10531.68) v1@20523.78,10512.9 ; v1(20516,10505.12) 20516,11070.1 20870,11424.1 ; P2.5@20861.09,11437.15 cw(c20856,11424.1) 20870,11424.1 ; P2.5@20870,11460 20870,11424.1 ; P2.5@20878.91,11437.15 ccw(c20884,11424.1) 20870,11424.1
  Bottom Layer w10: v1(19932,10075.76) 20328.61,10472.37 20480.85,10472.37 v1@20514,10505.52 ; v1@19932,10086.76 ccw(c19932,10113.32) 19950.78,10094.54 ccw(c19969.56,10075.76) v1@19943,10075.76 ; 20493.12,10484.64 cw(c20516,10461.77) v1@20516,10494.12 ; 20498.92,10490.44 ccw(c20484.24,10505.12) v1@20505,10505.12
USART_TX: P2.6 U3.30 | length 2280.6
  Top Layer w10: v1@19892,10086.84 ccw(c19892,10108.22) 19907.12,10093.1 ; v1@19892,10096.84 ccw(c19892,10142.37) 19924.19,10110.17 ; v1@19898,10094.66 19908.68,10094.66 ; v1@19899.09,10094.25 ccw(c19903.66,10099.68) 19908.68,10094.66 ; U3.30@19932.18,10167.37 19932.18,10118.16 19908.68,10094.66 ; v1@20462.22,10510.63 ccw(c20421.72,10551.14) 20479,10551.14 ; v1@20469.29,10503.56 ccw(c20445.86,10527) 20479,10527 ; v1(20470,10502.85) 20479,10511.85 20479,11076.53 20770,11367.53 P2.6@20770,11460 ; P2.6@20752.66,11442.66 cw(c20710.79,11400.79) 20770,11400.79 cw(c20829.21,11400.79) P2.6@20787.34,11442.66 ; P2.6@20759.73,11449.73 cw(c20734.93,11424.93) 20770,11424.93 cw(c20805.07,11424.93) P2.6@20780.27,11449.73
  Bottom Layer w10: v1(19892,10085.84) 19977.42,10171.26 20002.07,10171.26 20335.47,10504.66 v1@20458.96,10504.66 ; v1@19892,10096.84 ccw(c19892,10123.39) 19910.78,10104.61 ccw(c19929.56,10085.84) v1@19903,10085.84 ; 20439.07,10504.66 cw(c20439.07,10471.93) v1@20462.22,10495.08 ; 20447.81,10504.66 ccw(c20447.81,10525.04) v1@20462.22,10510.63
USB_DN: R2.2 U3.32 | length 1240.3
  Top Layer w10: R2.2@18975,10186 19009.29,10186 ; R2.2@18986.01,10175.82 cw(c19009.29,10154.3) 19009.29,10186 ; R2.2@18986.01,10196.18 ccw(c19009.29,10217.7) 19009.29,10186 ; U3.32@19971.55,10167.37 19971.55,10069.72 19946.79,10044.96 19814.08,10044.96 19748.19,10110.84 19296.26,10110.84 19190.72,10216.37 19039.67,10216.37 19009.29,10186
USB_DP: R1.1 R4.2 U3.33 | length 1263.3
  Top Layer w10: R1.1@19155,10181 19194.44,10181 19283.15,10092.3 19741.46,10092.3 19806.67,10027.08 19959.33,10027.08 19991.24,10058.99 U3.33@19991.24,10167.37 ; R1.1@19165.61,10170.39 cw(c19191.21,10144.79) 19191.21,10181 cw(c19191.21,10217.21) R1.1@19165.61,10191.61
  Top Layer w15: R4.2@19065,10181 R1.1@19155,10181 ; R4.2@19073.84,10172.16 cw(c19095.18,10150.82) 19095.18,10181 cw(c19095.18,10211.18) R4.2@19073.84,10189.84 ; R1.1@19146.16,10172.16 ccw(c19124.82,10150.82) 19124.82,10181 ccw(c19124.82,10211.18) R1.1@19146.16,10189.84
V_BATTERY: BAT1.1 S1.1 U2.3 | length 397.8
  Top Layer w20: U2.3@19452,9787.5 19452,9677 BAT1.1@19425,9650 19495.26,9720.26 19559.74,9720.26 S1.1@19620,9660
VBAT: C10.2 C11.2 C12.2 L1.2 R7.1 S1.2 U4.4 U4.6 | length 1112.2
  Top Layer w25: S1.2@19690,9660 19690,9810 19690,9969 R7.1@19691,9970 ; 19690,9789.48 cw(c19711.52,9789.48) C12.2@19696.3,9804.7 ; 19690,9830.52 ccw(c19711.52,9830.52) C12.2@19696.3,9815.3 ; 19690,9869.48 cw(c19711.52,9869.48) C11.2@19696.3,9884.7 ; 19690,9910.52 ccw(c19711.52,9910.52) C11.2@19696.3,9895.3 ; 19690,9949.48 cw(c19711.52,9949.48) R7.1@19696.3,9964.7 ; C11.2@19691,9890 19695,9886 C10.2@19830,9886 ; C11.2@19698.8,9895.3 ccw(c19721.26,9917.76) 19721.26,9886 ; C10.2@19830,9876 cw(c19830,9829.37) 19862.97,9862.34 ; 19879.23,9833.57 ccw(c19907.39,9861.73) U4.6@19907.92,9821.91 ; L1.2@19914.84,9970.74 ccw(c19892.49,9948.4) 19892.49,9980 ccw(c19892.49,10011.6) L1.2@19914.84,9989.26 ; U4.6@19918.74,9822.6 19890.2,9822.6 19870.37,9842.43 19870.37,9854.94 19839.31,9886 C10.2@19830,9886 ; U4.4@19918.74,9897.4 19918.74,9968.74 L1.2@19930,9980 19845.7,9980 19830,9964.3 C10.2@19830,9886 ; 19918.74,9935.47 cw(c19968.62,9935.47) L1.2@19933.35,9970.74
VBUS: C3.2 C4.2 CN1.1 R6.2 U2.4 | length 789.5
  Top Layer w15: v1@18943.99,9912.5 ccw(c18920.26,9936.23) CN1.1@18953.82,9936.23 ; v1@18953.82,9903.46 CN1.1@18953.82,9960
  Top Layer w25: R6.2@19311,9865 19311,9935 C3.2@19355,9979 C4.2@19450,9979 19450,9894.5 U2.4@19452,9892.5 ; C3.2@19337.93,9961.93 cw(c19355,9944.86) C3.2@19355,9969
  Bottom Layer w15: v1@19308.12,9906.49 v1(19309,9905.61)
  Bottom Layer w20: v1(18950,9906.49) v1@19308.12,9906.49 ; 19292.39,9906.49 cw(c19292.39,9888.99) v1@19304.76,9901.36
pads on no net: J1.0 J2.0 S1. S1.3 U1.4 U3.3 U3.4 U3.38 U3.39 U3.40 U4.3 U5.3@19030,11155 U6.19 U6.21 U6.23

## Polygon pours and split planes (outlines as drawn)
GND on Top Layer "Bottom Layer-No Net 1" (solid, remove dead copper): 16154,12072.06 16327.73,12245.78 23856,12245.78 23856,7308.73 24319,6845.73 23855.72,6382.46 15792,6382.46 15792,11709.53 16169,12086.53
RF_3V3 on Top Layer "Bottom Layer-No Net 1" (solid, remove dead copper): 19775,11525.45 18671,11525.45 18671,10640.4 18653,10622.4 19466.43,10622.4 19606,10761.97 19818.98,10974.95 20127,10974.95 20230.52,10974.95 20308,11052.43 20300,11060.43 20300,11161.23 19900.77,11161.23 19862,11200 19811,11251 19811,11529.13 19780.98,11529.13 19775,11523.15
GND on Bottom Layer "Bottom Layer-No Net 1" (solid, remove dead copper): 15474,12274.74 15937.28,12738.01 24059,12738.01 24059,7279.62 24739,6599.62 24681.09,6541.71 15763,6541.71 15430,6874.71 15430,12289.22 15503.09,12289.22 15561,12231.31
RF_GND on Bottom Layer "Bottom Layer-No Net 1" (solid, remove dead copper): 18671,11503.93 18666,11498.93 18666,10627.33 19069.56,10627.33 19200,10757.77 19245.4,10803.17 19566,10803.17 19566,10849.12 19692,10975.12 19723.65,11006.77 20182,11006.77 20182,11188.44 20173.14,11179.58 19865,11179.58 19805,11239.58 19805,11518.54 18677.72,11518.54 18660,11536.27 18664,11532.27 18664,11491.96

## Keep-outs
Keep-Out Layer:
  the board outline again, w10

## Other copper
Top Layer:
  rectangle net RF_3V3: 19179,11252.72 19271,11290.19
  rectangle net GND: 19635,10802.61 19718,10870.89
  pour cut-out: 19804,11523.83 19817,11510.83 19817,11152.64 20223,11152.64 20273,11202.64 20273,11527.16 19818.99,11527.16 19814,11522.16
Bottom Layer:
  rectangle net RF_3V3: 19575,10771.74 19624,10828.47
  pour cut-out: 19794,11534.13 19804.99,11523.15 20272,11523.15 20272,11162.47 20250,11140.47 20237.18,11153.29 19817,11153.29 19797,11173.29 19797,11523.15

## Silkscreen, mask and mechanical layers (free items; w line width, h text height)
Top Overlay:
  circle w10: c17994.49,10744 r708.66
  circle w10: c21931.51,10744 r708.66
  text "TX" at 20730,11389.1 h60 r270
  text "DIO" at 20926,11387.17 h60 r270
  text "CLK" at 21030,11385.89 h60 r270
  text "GND" at 21233,11385.89 h60 r270
  text "V33" at 21131,11385.24 h60 r270
  text "RX" at 20835,11382.67 h60 r270
Bottom Overlay:
  text "DreamRoad" at 20466,10407.45 h100
  text "2018-09-02" at 20495,10204.88 h100
  text "V33" at 20534,9702.27 h100 r270
  text "V33" at 20396,9697.41 h100 r270
  text "GND" at 20241,9692.55 h100 r270
  text "V5" at 19981,9690.12 h100 r270
  text "V5" at 20116,9682.83 h100 r270